# Altium PCB RHD2164 USBC.PcbDoc
Units mil, origin at the board's own origin, x right, y up, seen from the top; angles counter-clockwise.
Board outline 550.1 x 1005 mil, 6 copper layers (Top Layer, Second Layer, Third Layer, Fourth Layer, Fifth Layer, Bottom Layer), stack 32.112 mil thick; 11 components, 76 nets, 223 pads, 147 vias.
Unrouted connection lines stored in the file: 132.
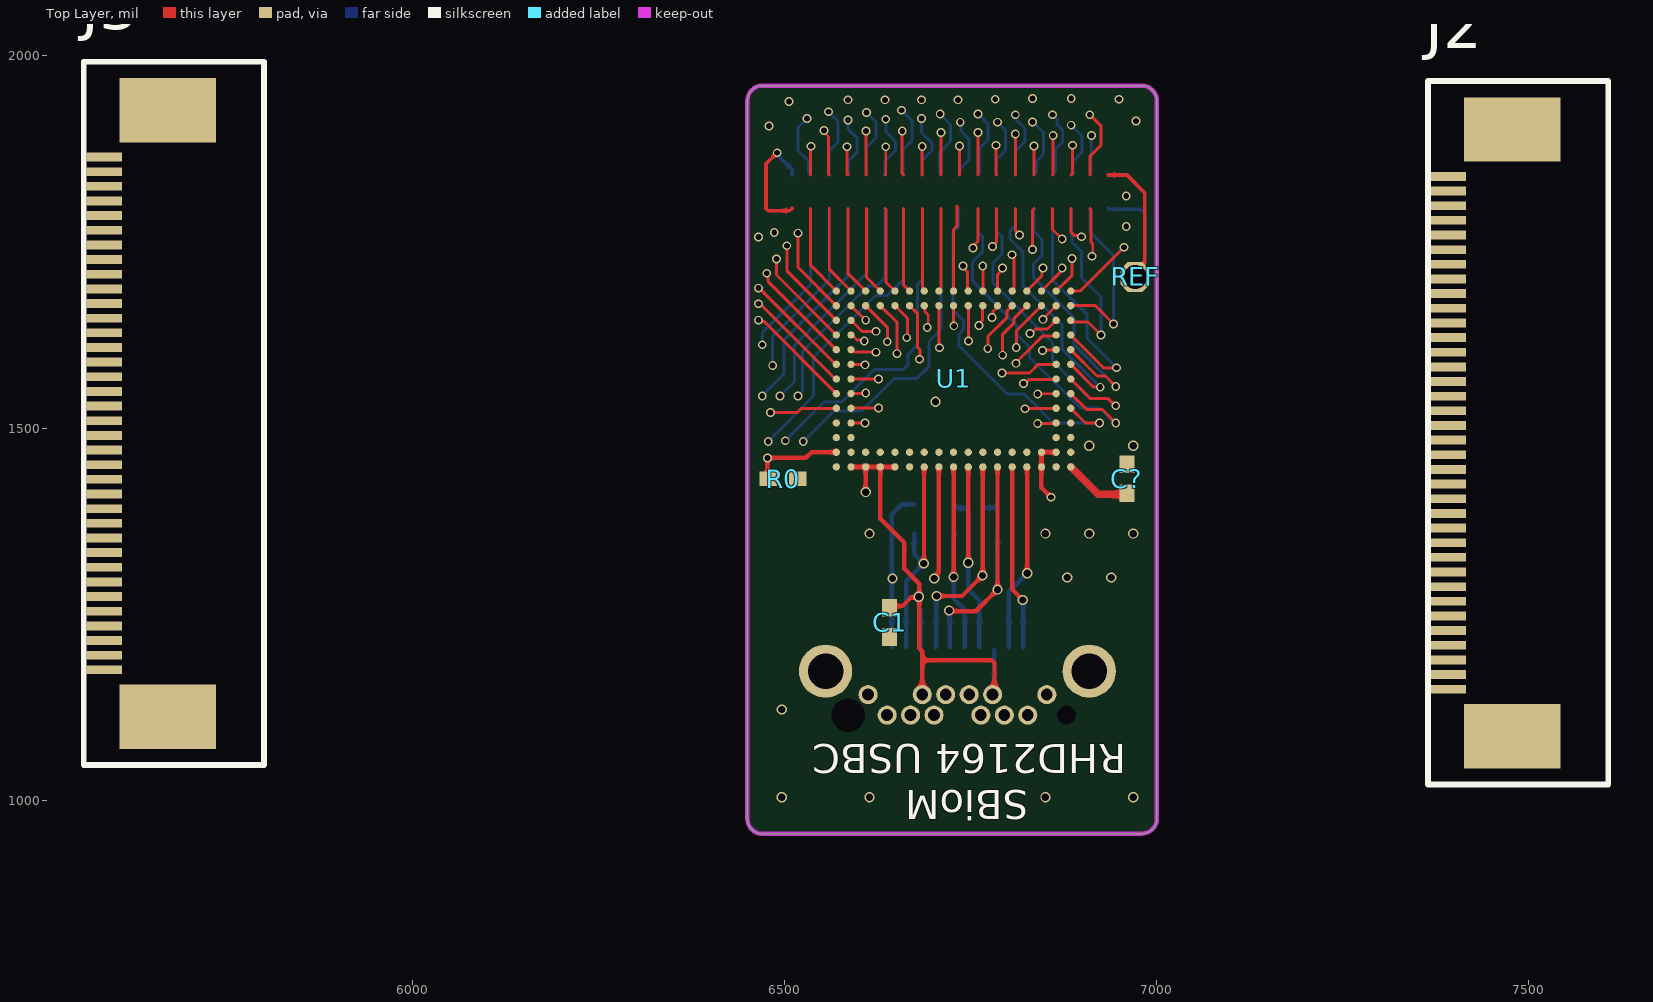
[diagram p0: Top Layer view]
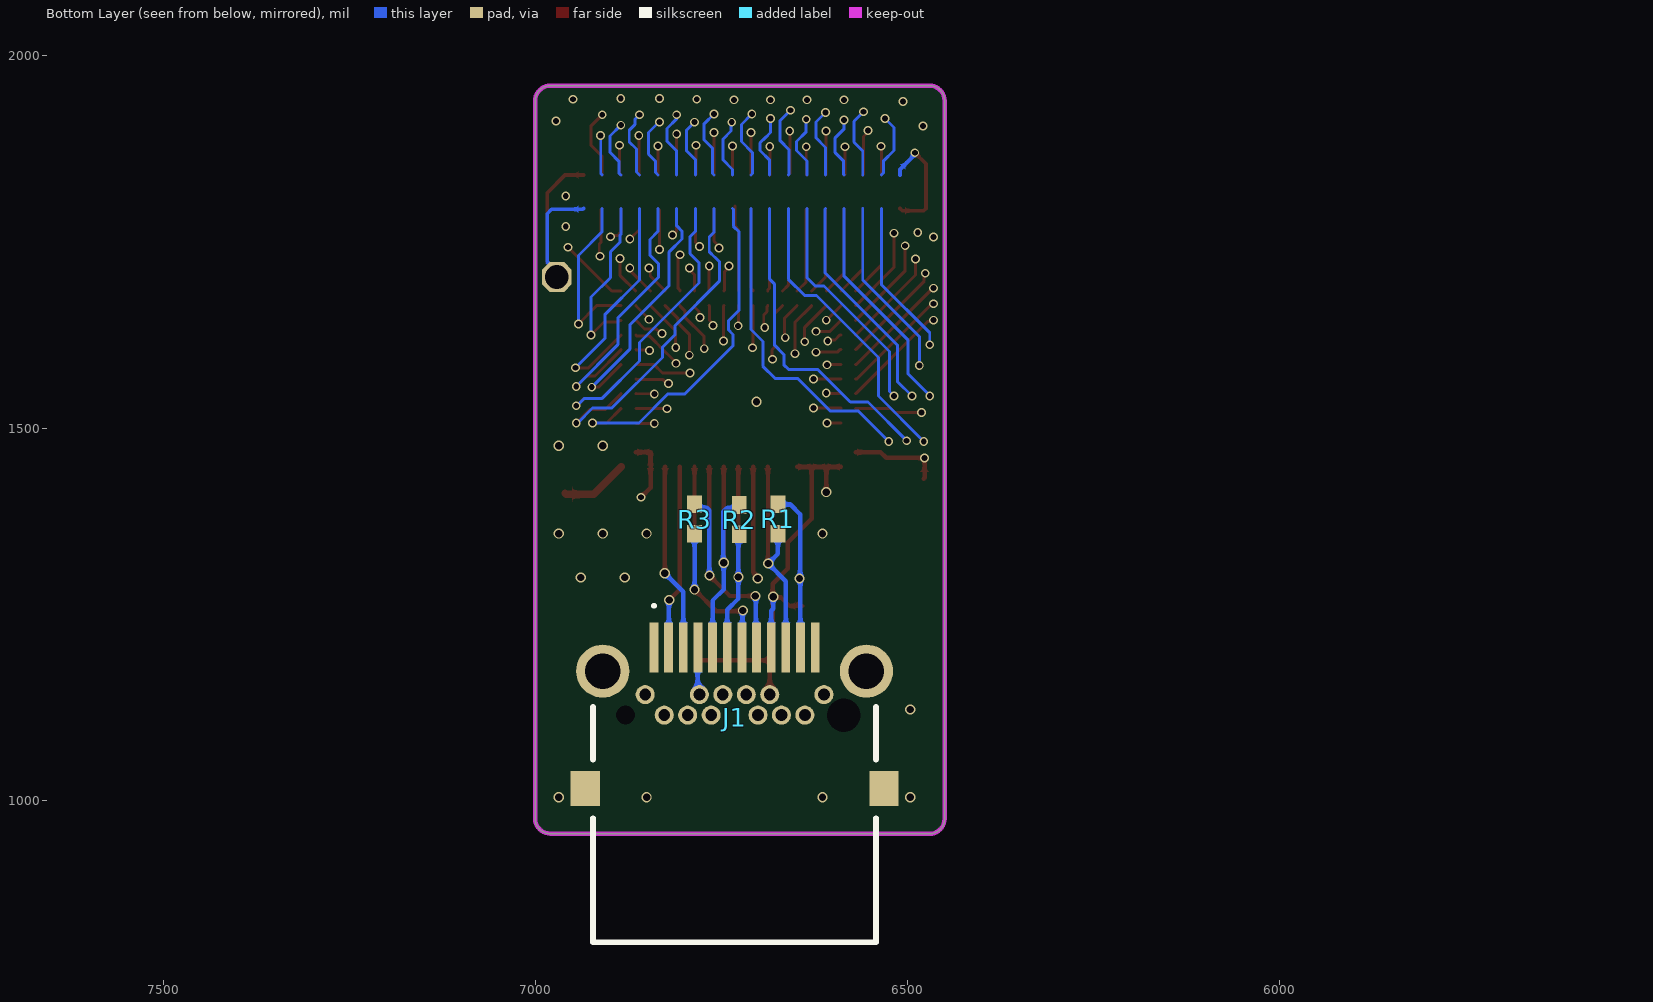
[diagram p1: Bottom Layer view, seen from below]
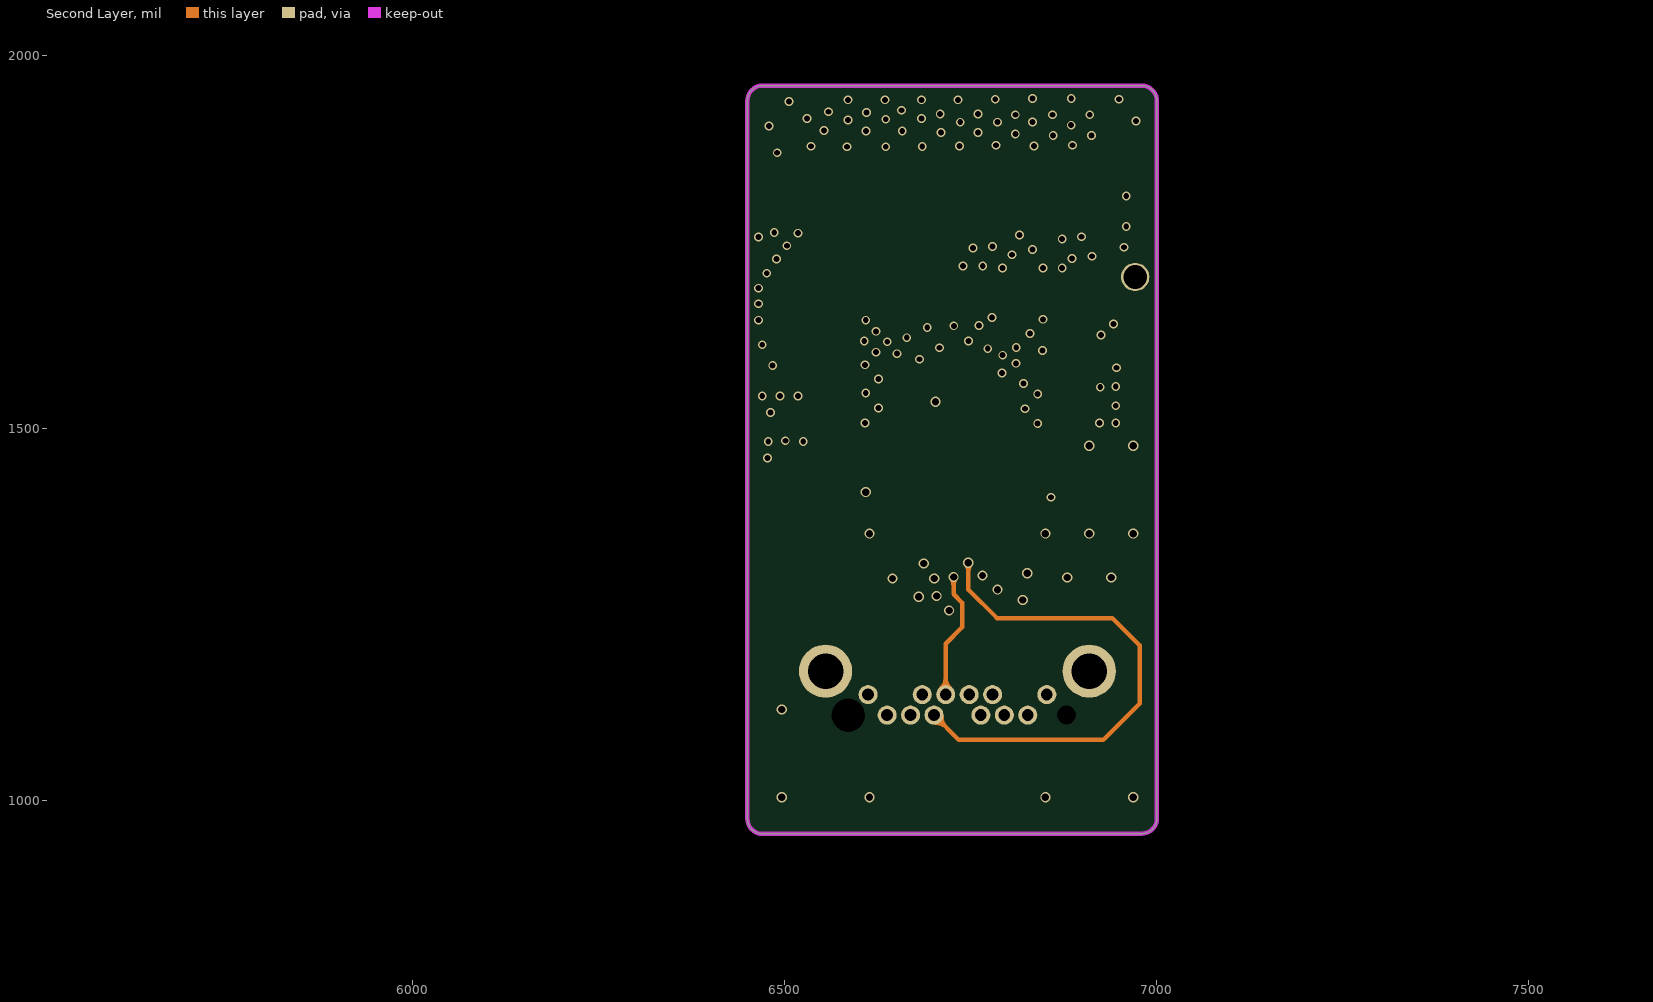
[diagram p2: Second Layer]
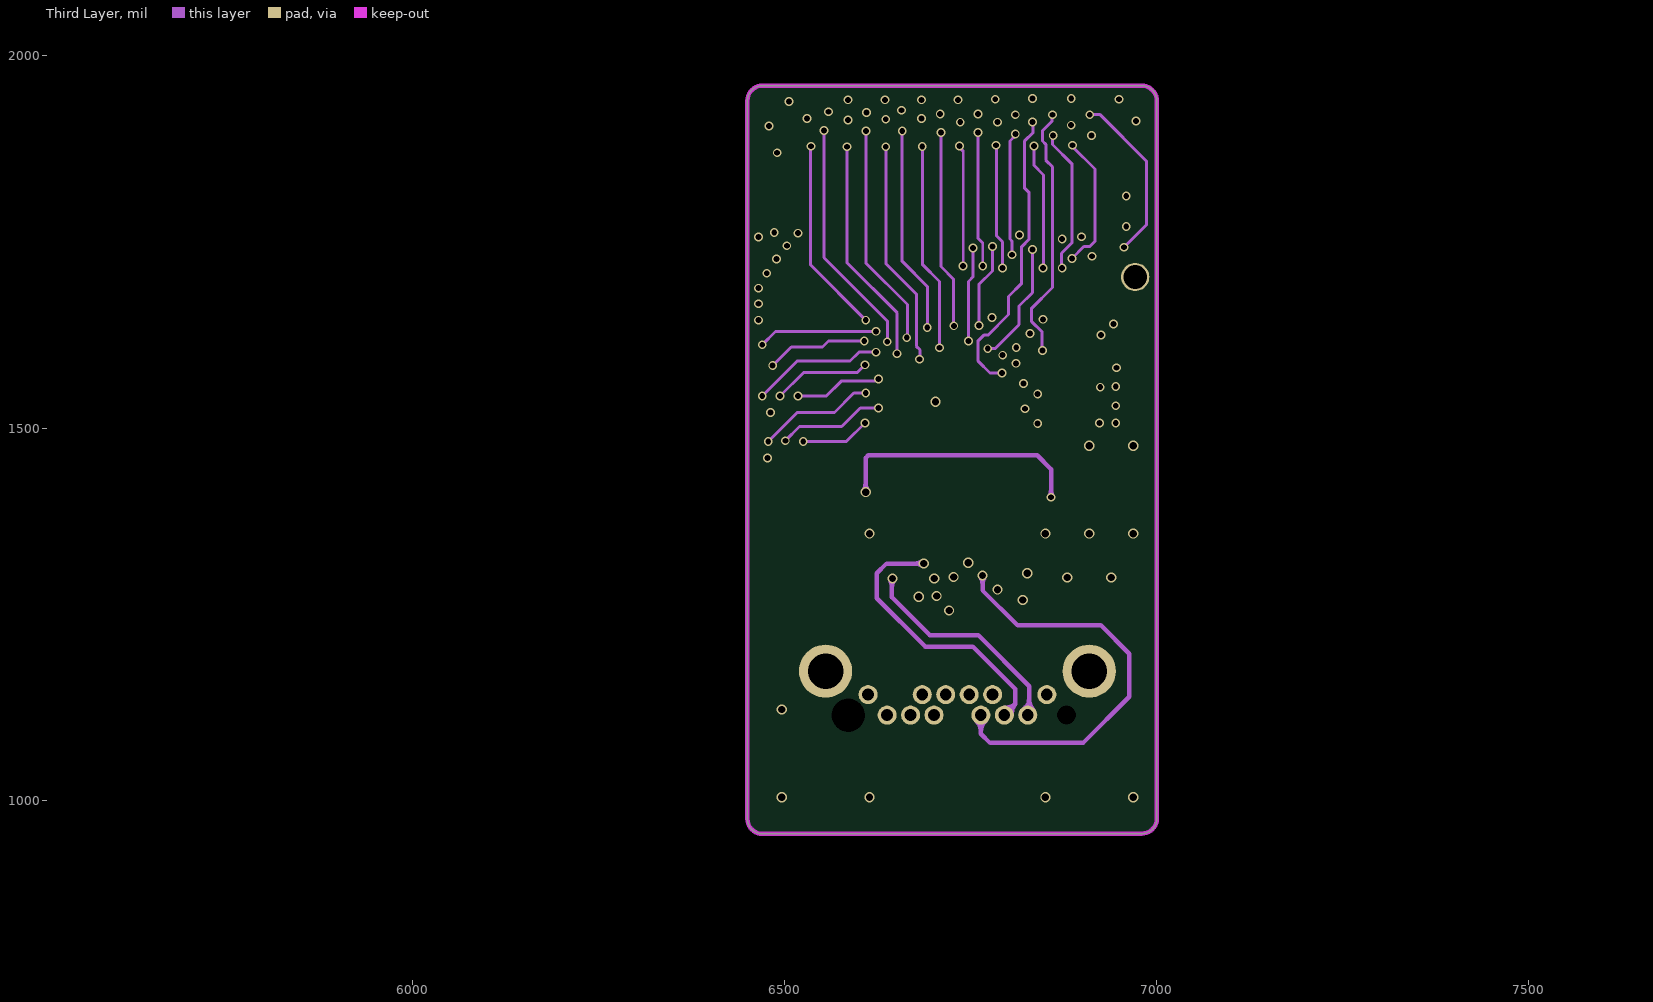
[diagram p3: Third Layer]
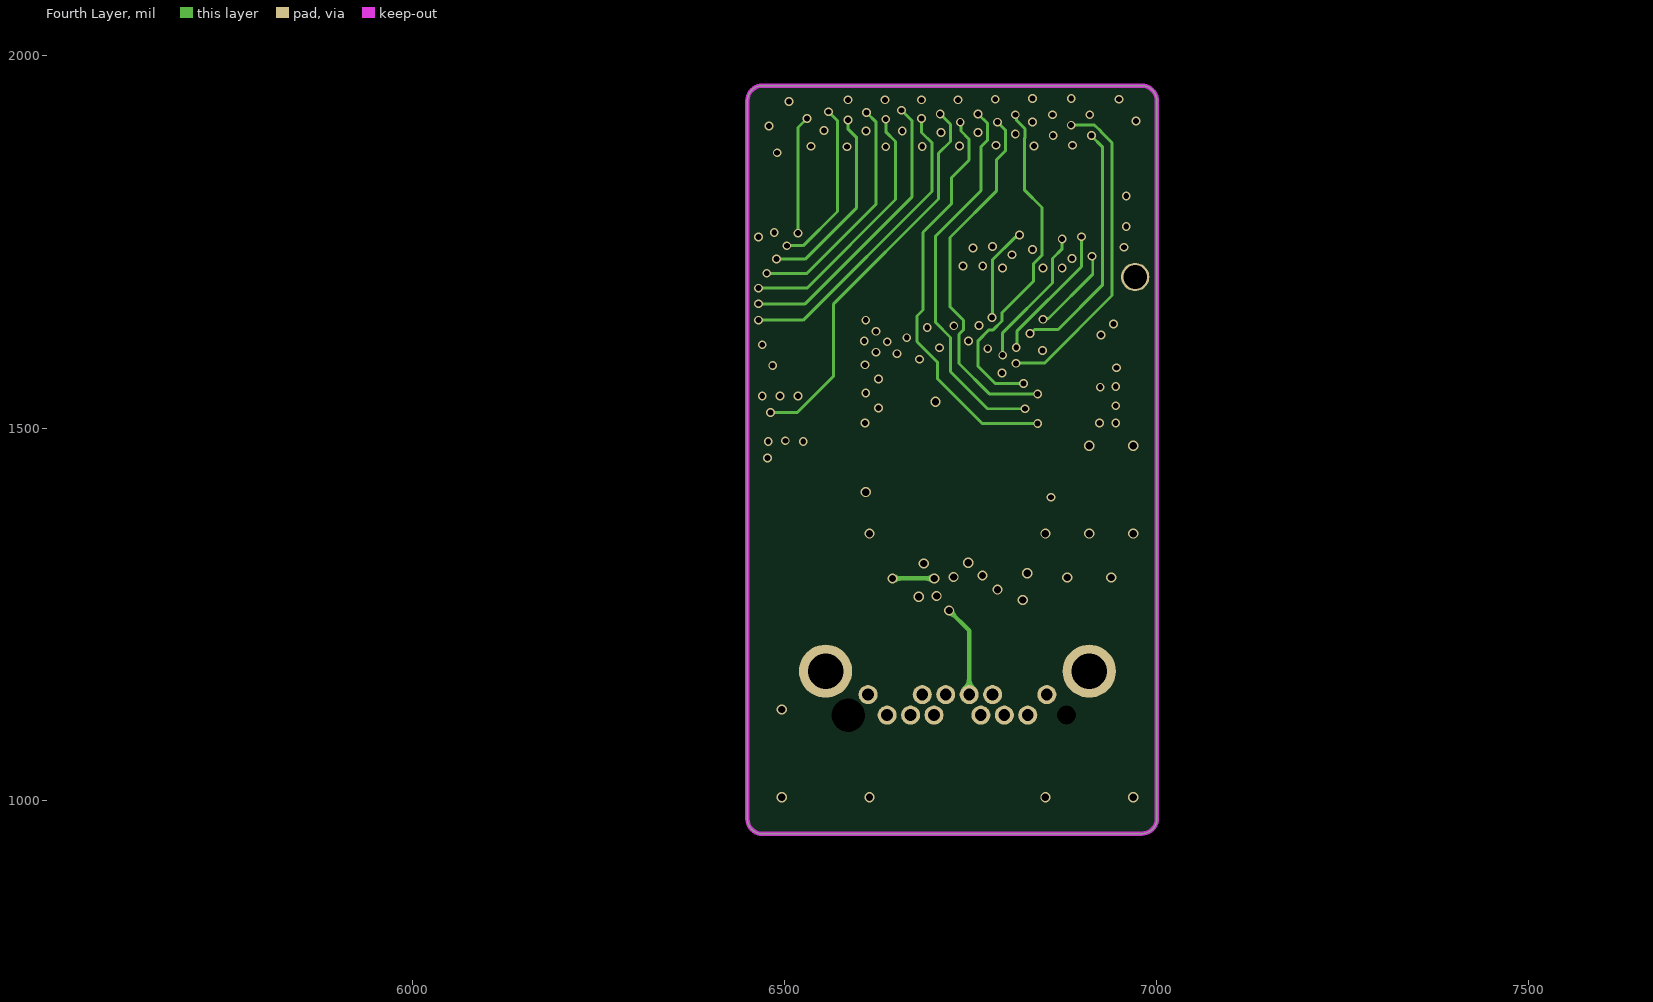
[diagram p4: Fourth Layer]
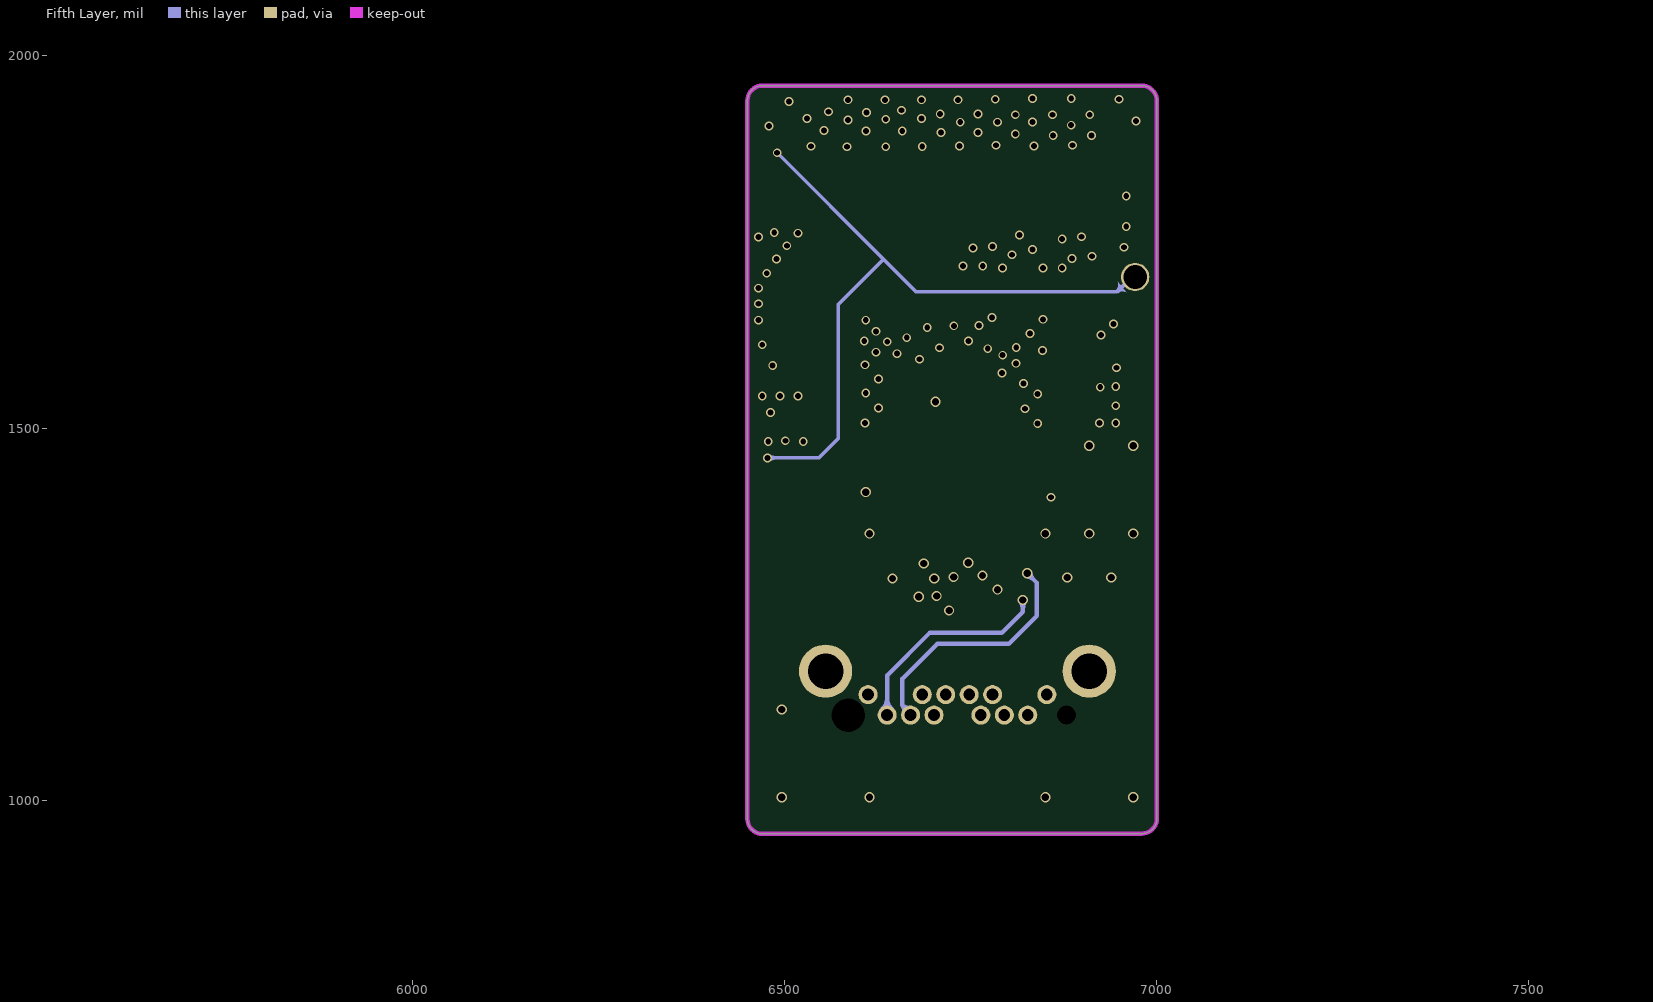
[diagram p5: Fifth Layer]

## Layer stack, top to bottom
Top Solder: solder mask 0.4, Solder Resist, Dk 3.5
Top Layer: signal copper 1.378
Dielectric 4: prepreg 2.8, PP-006, Dk 4.1
Second Layer: signal copper 1.378
Dielectric 2: prepreg 2.8, PP-006, Dk 4.1
Third Layer: signal copper 1.4
Dielectric 1: dielectric 12.6, FR-4, Dk 4.8
Fourth Layer: signal copper 1.4
Dielectric 3: prepreg 2.8, PP-006, Dk 4.1
Fifth Layer: signal copper 1.378
Dielectric 5: prepreg 2.8, PP-006, Dk 4.1
Bottom Layer: signal copper 1.378
Bottom Solder: solder mask 0.4, Solder Resist, Dk 3.5

## Board outline
6450,975 6450,1940 cw(c6470,1940) 6470,1960 6980,1960 cw(c6980,1940) 7000,1940 7000,975 7000.1,975.19 cw(c6980.1,975.19) 6980.1,955.19 6980,955 6470,955 cw(c6470,975)

## Design rules (kind name [scope] priority, off if disabled: settings)
Clearance [All] p1: gap=10 ignorepadtopadclearanceinfootprint=FALSE except(0: Arc-Hole Track-Hole SMDPad-Hole THPad-Hole Via-Hole Fill-Hole Poly-Hole Region-Hole Text-Hole; 5: Arc-Arc Arc-Track Arc-SMDPad Arc-THPad Arc-Via Arc-Fill Arc-Poly Arc-Region Arc-Text Track-Track Track-SMDPad Track-THPad Track-Via Track-Fill Track-Poly Track-Region Track-Text)
PolygonConnect [All] p1: connectstyle=Direct reliefconductorwidth=10 reliefentries=4 polygonreliefangle="90 Angle" airgapwidth=10
RoutingVias [All] p1: holewidth=7.87 width=11.81 viastyle="Through Hole" minholewidth=7.87 minwidth=11.81 maxholewidth=9.84 maxwidth=13.78
SolderMaskExpansion SolderMaskExpansion_1 [IsVia] p1: expansion=4 istentingtop=TRUE
SolderMaskExpansion [All] p2: expansion=4 istentingtop=FALSE
SupplyNets "Schematic Supply Nets_1" [InNet('GND')] p1: voltage=0.000
SupplyNets "Schematic Supply Nets" [InNet('VCC')] p2: voltage=0.000
Width [All] p1: maxlimit=10 minlimit=4 preferedwidth=5 minimp=50.000000 maximp=50.000000 favimp=50.000000
30 further rules are at their usual default settings.

## Components (designator, comment, footprint, x,y, rotation, side; value= is the part's Value field where it differs from the comment)
C1 "100n" 0402 6641,1239 r270 top
C? "10n" 0402 6960,1432 r90 top
J1 "UJ32-C-H-G-H2-SMT-TR" UJ32CHGH2SMTTR 6732.21,1006.16 r180 bottom
J2 "3-2492104-6" CON_ZIF_RA_36POS 7392,1493.68 r90 top
J3 "3-2492104-6" CON_ZIF_RA_36POS 5586,1519.73 r90 top
R0 "0" 0402 6498,1432 r180 top
R1 "Res Semi" 0402 6673.95,1377.81 r90 bottom value=100
R2 "Res Semi" 0402 6726,1377 r90 bottom value=100
R3 "Res Semi" 0402 6786,1377.81 r270 bottom value=100
REF "TESTPOINT_SMALL" TESTPOINT_SMALL 6971,1703 r90 top
U1 "Intan Technologies RHD2164 chip, BGA package (9x7mm 104-pin)" BGA104_9X7 6727,1566 r0 top

## Footprints (in the part's own frame and the unit in brackets; to place one, negate y for a bottom-side part, rotate by r counter-clockwise, add the part's x,y. Pads: shape width x height; smd on the part's side, far side on the other; paste and mask are expansions set on the pad)
0402 [mm] "Chip Capacitor, Body 1.0x0.5mm, IPC High Density"
  rect 0.6x0.5 smd: 1(-0.5,0) 2(0.5,0)
  body extent -0.55,-0.3 0.55,0.3, height 1.3
BGA104_9X7 [mm]
  rrect100% 0.25x0.25 smd: A1(-4,3) A2(-3.5,3) A3(-3,3) A4(-2.5,3) A5(-2,3) A6(-1.5,3) A7(-1,3) A8(-0.5,3) A9(0,3) A10(0.5,3) A11(1,3) A12(1.5,3) A13(2,3) A14(2.5,3) A15(3,3) A16(3.5,3) A17(4,3) B1(-4,2.5) B2(-3.5,2.5) B3(-3,2.5) B4(-2.5,2.5) B5(-2,2.5) B6(-1.5,2.5) B7(-1,2.5) B8(-0.5,2.5) B9(0,2.5) B10(0.5,2.5) B11(1,2.5) B12(1.5,2.5) B13(2,2.5) B14(2.5,2.5) B15(3,2.5) B16(3.5,2.5) B17(4,2.5) C1(-4,2) C2(-3.5,2) C16(3.5,2) C17(4,2) D1(-4,1.5) D2(-3.5,1.5) D16(3.5,1.5) D17(4,1.5) E1(-4,1) E2(-3.5,1) E16(3.5,1) E17(4,1) F1(-4,0.5) F2(-3.5,0.5) F16(3.5,0.5) F17(4,0.5) G1(-4,0) G2(-3.5,0) G16(3.5,0) G17(4,0) H1(-4,-0.5) H2(-3.5,-0.5) H16(3.5,-0.5) H17(4,-0.5) J1(-4,-1) J2(-3.5,-1) J16(3.5,-1) J17(4,-1) K1(-4,-1.5) K2(-3.5,-1.5) K16(3.5,-1.5) K17(4,-1.5) L1(-4,-2) L2(-3.5,-2) L16(3.5,-2) L17(4,-2) M1(-4,-2.5) M2(-3.5,-2.5) M3(-3,-2.5) M4(-2.5,-2.5) M5(-2,-2.5) M6(-1.5,-2.5) M7(-1,-2.5) M8(-0.5,-2.5) M9(0,-2.5) M10(0.5,-2.5) M11(1,-2.5) M12(1.5,-2.5) M13(2,-2.5) M14(2.5,-2.5) M15(3,-2.5) M16(3.5,-2.5) M17(4,-2.5) N1(-4,-3) N2(-3.5,-3) N3(-3,-3) N4(-2.5,-3) N5(-2,-3) N6(-1.5,-3) N7(-1,-3) N8(-0.5,-3) N9(0,-3) N10(0.5,-3) N11(1,-3) N12(1.5,-3) N13(2,-3) N14(2.5,-3) N15(3,-3) N16(3.5,-3) N17(4,-3)
CON_ZIF_RA_36POS [mm] "3-2492104-6 / 36 Position FPC Connector Contacts, Bottom 0.020\" (0.50mm) Surface Mount, Right Angle"
  rect 0.3x1.2 smd mask+0: 1(-8.75,0) 2(-8.25,0) 3(-7.75,0) 4(-7.25,0) 5(-6.75,0) 6(-6.25,0) 7(-5.75,0) 8(-5.25,0) 9(-4.75,0) 10(-4.25,0) 11(-3.75,0) 12(-3.25,0) 13(-2.75,0) 14(-2.25,0) 15(-1.75,0) 16(-1.25,0) 17(-0.75,0) 18(-0.25,0) 19(0.25,0) 20(0.75,0) 21(1.25,0) 22(1.75,0) 23(2.25,0) 24(2.75,0) 25(3.25,0) 26(3.75,0) 27(4.25,0) 28(4.75,0) 29(5.25,0) 30(5.75,0) 31(6.25,0) 32(6.75,0) 33(7.25,0) 34(7.75,0) 35(8.25,0) 36(8.75,0)
  rect 2.2x3.3 smd mask+0: M1(-10.35,-2.17) M2(10.35,-2.17)
  silkscreen extent -12,-5.45 12,0.7
TESTPOINT_SMALL [mil]
  oct 40x40 / inner round 38 / far side oct 40x40 hole 32: 1(0,0)
UJ32CHGH2SMTTR [mm]
  rect 0.3x1.7 smd: A1(-2.75,5.06) A2(-2.25,5.06) A3(-1.75,5.06) A4(-1.25,5.06) A5(-0.75,5.06) A6(-0.25,5.06) A7(0.25,5.06) A8(0.75,5.06) A9(1.25,5.06) A10(1.75,5.06) A11(2.25,5.06) A12(2.75,5.06)
  round 0.65 hole 0.4: B1(3.05,3.45) B2(2.4,2.75) B3(1.6,2.75) B4(1.2,3.45) B5(0.8,2.75) B6(0.4,3.45) B7(-0.4,3.45) B8(-0.8,2.75) B9(-1.2,3.45) B10(-1.6,2.75) B11(-2.4,2.75) B12(-3.05,3.45)
  round 1.815 hole 1.21: MH1(-4.5,4.25) MH2(4.5,4.25)
  round 0.325 hole 0.65 unplated: MH3(-3.725,2.75)
  round 0.57 hole 1.14 unplated: MH4(3.725,2.75)
  rect 1x1.2 smd: MP1(-5.1,0.25) MP2(5.1,0.25)
  silkscreen extent -4.82,-5 4.82,6.53

## Part data
C1 C?: library part C_0402, "Capacitor", DeviceName=_0402, DeviceSetName=C, GateName_1=C, LibraryName=RHD2000_eval_board, SymbolName_1=C
J1: "USB Connectors Type C USB 3.2 Gen 2x2 20 Gbps 20 Vac 5 A Horizontal Gold Flash Surface Mount", Manufacturer_Name="Same Sky", Mouser Part Number=179-UJ32CHGH2SMTTR, Datasheet Link=https://www.cuidevices.com/product/resource/uj32-c-h-g-h2-smt-tr.pdf, Geometry.Height=3.62mm, Manufacturer_Part_Number=UJ32-C-H-G-H2-SMT-TR, Mouser Price/Stock=https://www.mouser.co.uk/ProductDetail/CUI-Devices/UJ32-C-H-G-H2-SMT-TR?qs=vvQtp7zwQdN9hqweK3Xukg%3D%3D
J2 J3: library part CON_ZIF_RA_36POS, "36 Position FPC Connector Contacts, Bottom 0.020\" (0.50mm) Surface Mount, Right Angle", GRAMS Lib Spec=2.7
R0: library part R_0402, "Resistor", DeviceName=_0402, DeviceSetName=R, GateName_1=R, LibraryName=RHD2000_eval_board, SymbolName_1=R
R1 R2 R3: "Semiconductor Resistor", LatestRevisionDate=17-Jul-2002, LatestRevisionNote="Re-released for DXP Platform.", PackageDescription="Axial Device, Thru-Hole; 2 Leads; 0.5 in Pin Spacing", PackageReference=AXIAL-0.5, Published=8-Jun-2000, Publisher="Altium Limited"
REF: "PCB Test Point", DeviceName=_SMALL, DeviceSetName=TESTPOINT, GateName_1=TP$1, LibraryName=RHD2000_eval_board, SymbolName_1=TESTPOINT
U1: library part RHD2164_BGA_BGA, Package=BGA104_9X7, DeviceName=_BGA, DeviceSetName=RHD2164_BGA, GateName_1=A, LibraryName=RHD2000, SymbolName_1=RHD2164_BGA

## Via types
v1: diameter 11.81, hole 7.87, Top Layer to Bottom Layer, tented both sides, 120 vias
v2: diameter 13.78, hole 9.84, Top Layer to Bottom Layer, tented both sides, 27 vias

## Nets (pads, with @x,y where several pads share a name; then routed paths per layer and width w, separated by ;. In a path a pad name is that pad's centre, name@x,y a point inside that pad or via, vN(x,y) a via of type N, cw(c..) or ccw(c..) an arc to the next point about the centre after c; other vN are vias at no path point)
GND: C1.2 C?.2 J1.A1 J1.A12 J1.B1 J1.B12 J1.MH1 J1.MH2 J1.MP1 J1.MP2 J2.18 J2.19 J3.18 J3.19 R0.1 U1.K1 U1.K17 U1.L1 U1.L2 U1.L16 U1.M2 U1.M3 U1.M4 U1.M5 U1.M6 U1.M7 U1.M8 U1.M9 U1.M10 U1.M11 U1.M12 U1.M13 U1.M14 U1.M17 U1.N1 U1.N6
  other v1: 6465.08,1756.76 6486.08,1762.76 6959,1771 6959.08,1811.76 6479.08,1905.76 6972.08,1912.76 6506.08,1938.76 6585,1941 6635,1941 6684,1941 6733,1941 6783.08,1941.76 6949.08,1941.76 6833.08,1942.76 6885.08,1942.76
  other v2: 6496.06,1003.94 6614.17,1003.94 6850.39,1003.94 6968.5,1003.94 6496.06,1122.05 6879.92,1299.21 6938.97,1299.21 6614.17,1358.27 6850.39,1358.27 6909.45,1358.27 6968.5,1358.27 6909.45,1476.38 6968.5,1476.38 6702.75,1535.43
INPUT_01: J3.1 U1.K2 | length 541.8
  Top Layer w4: U1.K2@6589.23,1506.97 v1(6608,1507)
  Third Layer w4: v1(6525,1482) 6583,1482 v1(6608,1507)
  Bottom Layer w4: v1(6525,1482) 6566,1523 6603.75,1523 6647.58,1566.83 6677.83,1566.83 6694.19,1583.19 6694.19,1603.47 6694,1603.65 6694,1616.41 6710,1632.41 6710,1795
INPUT_02: J3.2 U1.J1 | length 713.8
  Top Layer w4: v1(6481,1521) 6517.14,1521 6522.77,1526.63 U1.J1
  Fourth Layer w4: v1(6481,1521) 6481.2,1521.2 6517.34,1521.2 6523.14,1527 6565.97,1569.84 6565.97,1666.97 6706.91,1807.91 6706.91,1869.16 6722.91,1885.16 6722.91,1908.09 v1(6709,1922)
  Bottom Layer w4: v1(6709,1922) 6723,1908 6723,1885 6708,1870 6708,1842 6710,1840
INPUT_03: J3.3 U1.J2 | length 605.3
  Top Layer w4: U1.J2 6589.39,1526.82 6625.81,1526.82 v1(6626,1527)
  Third Layer w4: v1(6501,1483) 6520,1502 6576.73,1502 6601.73,1527 v1(6626,1527)
  Bottom Layer w4: v1(6501,1483) 6553,1535 6576.75,1535 6620.65,1578.91 6659.91,1578.91 6666,1585 6666,1599 6678.84,1611.84 6678.84,1693.84 6685,1700 6685,1795
INPUT_04: J3.4 U1.H1 | length 641.1
  Top Layer w4: v1(6465,1645) 6466.49,1643.51 6472.32,1643.51 U1.H1
  Fourth Layer w4: v1(6465,1645) 6525,1645 6697.91,1817.91 6697.91,1883.35 6684,1897.25 v1(6684,1916)
  Bottom Layer w4: v1(6684,1916) 6684,1897 6690.09,1890.91 6690.35,1890.91 6698,1883.25 6698,1873 6685,1860 6685,1840
INPUT_05: J3.5 U1.H2 | length 575.6
  Top Layer w4: U1.H2 6589.55,1546.65 6608.65,1546.65 v1(6609,1547)
  Third Layer w4: v1@6478.14,1482.14 6517,1521 6567,1521 6593,1547 v1(6609,1547)
  Bottom Layer w4: v1(6478,1482) 6539,1543 6539,1595 6621.98,1677.98 6637.98,1677.98 6660,1700 6660,1795
INPUT_06: J3.6 U1.G1 | length 632.3
  Top Layer w4: v1(6465,1667) 6466.94,1667 6567.94,1566 U1.G1
  Fourth Layer w4: v1(6465,1667) 6527.73,1667 6670.91,1810.18 6670.91,1913.09 v1(6657,1927)
  Bottom Layer w4: v1(6657,1927) 6670.91,1913.09 6670.91,1885.91 6659,1874 6659,1841 6660,1840
INPUT_07: J3.7 U1.G2 | length 461.8
  Top Layer w4: U1.G2 v1(6626,1566)
  Third Layer w4: v1(6518,1543) 6556,1543 6576,1563 6620.89,1563 6623.89,1566 v1(6626,1566)
  Bottom Layer w4: v1(6518,1543) 6518,1543.25 6524,1549.25 6524,1603 6611.94,1690.94 6623.94,1690.94 6635,1702 6635,1795
INPUT_08: J3.8 U1.F1 | length 579.8
  Top Layer w4: v1(6465,1688) 6466.11,1688 6568.42,1585.69 U1.F1
  Fourth Layer w4: v1(6465,1688) 6530,1688 6649,1807 6649,1885 6636,1898 v1(6636,1915)
  Bottom Layer w4: 6635,1840 6635,1858.84 6649,1872.84 6649,1885 6636,1898 v1(6636,1915)
INPUT_09: J3.10 U1.F2 | length 451.4
  Top Layer w4: U1.F2 6589.55,1585.35 6607.65,1585.35 v1(6608,1585)
  Third Layer w4: v1(6494,1543) 6526,1575 6598,1575 v1(6608,1585)
  Bottom Layer w4: v1(6494,1543) 6513,1562 6513,1611 6611,1709 6611,1794 6610,1795
INPUT_10: J3.11 U1.E1 | length 550
  Top Layer w4: v1(6476,1708) 6477.49,1706.51 6477.49,1697.4 U1.E1
  Fourth Layer w4: v1(6476,1708) 6530,1708 6623,1801 6623,1911 v1(6610,1924)
  Bottom Layer w4: 6610,1840 6610,1877 6622.91,1889.91 6622.91,1911.09 v1(6610,1924)
INPUT_11: J3.12 U1.E2 | length 512.3
  Top Layer w4: U1.E2 6590.78,1605.37 6594.15,1602 v1(6623,1602)
  Third Layer w4: v1(6470,1543) 6517,1590 6588,1590 6600,1602 v1(6623,1602)
  Bottom Layer w4: v1(6470,1543) 6470,1543.84 6499,1572.84 6499,1618 6585,1704 6585,1795
INPUT_12: J3.13 U1.D1 | length 478.5
  Top Layer w4: v1(6489,1727) 6489,1705.58 U1.D1
  Fourth Layer w4: v1(6489,1727) 6527.73,1727 6596.91,1796.18 6596.91,1890.09 6585,1902 v1(6585,1914)
  Bottom Layer w4: 6585,1840 6585.66,1840.66 6585.66,1858.66 6597,1870 6597,1890 6585,1902 v1(6585,1914)
INPUT_13: J3.14 U1.D2 | length 400.3
  Top Layer w4: U1.D2 6590.78,1625.06 6597.35,1618.49 6605.51,1618.49 v1(6607,1617)
  Third Layer w4: v1(6484,1584) 6509,1609 6551,1609 6559,1617 v1(6607,1617)
  Bottom Layer w4: v1(6484,1584) 6484,1623 6560,1699 6560,1795
INPUT_14: J3.15 U1.C1 | length 449.3
  Top Layer w4: v1(6503,1745) 6503,1711.26 U1.C1
  Fourth Layer w4: v1(6503,1745) 6503.11,1745.11 6516.91,1745.11 6517.02,1745 6525,1745 6571.09,1791.09 6571.09,1912.91 v1(6559,1925)
  Bottom Layer w4: v1(6559,1925) 6571.91,1912.09 6571.91,1884.16 6560,1872.25 6560,1840
INPUT_15: J3.16 U1.C2 | length 410.3
  Top Layer w4: U1.C2 6603.94,1630 v1(6623,1630)
  Third Layer w4: v1(6470,1612) 6487.87,1629.87 6590.87,1629.87 ; 6590.91,1629.91 6622.91,1629.91 v1(6623,1630)
  Bottom Layer w4: v1(6470,1612) 6470,1628 6535,1693 6535,1795
INPUT_16: J3.17 U1.B1 | length 365.9
  Top Layer w4: v1(6518,1761.91) 6518,1715.95 U1.B1
  Fourth Layer w4: v1(6518,1761.91) 6518,1904 v1(6530,1916)
  Bottom Layer w4: v1(6530,1916) 6518,1904 6518,1873 6532.34,1858.66 6532.34,1842.66 6535,1840
INPUT_17: J2.20 U1.A1 | length 125.2
  Top Layer w4: 6535,1795 6535,1718.63 U1.A1
INPUT_18: J2.21 U1.B2 | length 331.3
  Top Layer w4: 6535,1840 6535,1878 v1(6535.63,1878.63) ; U1.B2 6589.39,1664.43 6608.81,1645 v1(6609,1645)
  Third Layer w4: v1(6535.63,1878.63) 6535,1878 6535,1719 v1(6609,1645)
INPUT_19: J2.22 U1.A2 | length 123
  Top Layer w4: 6560,1795 6560,1713.31 U1.A2
INPUT_20: J2.23 U1.B3 | length 442.6
  Top Layer w4: v1(6553,1900) 6553,1897.89 6559,1891.89 6559,1841 6560,1840 ; U1.B3 6638,1635.32 v1(6638,1616)
  Third Layer w4: v1(6553,1900) 6553,1729 6638,1644 v1(6638,1616)
INPUT_21: J2.24 U1.A3 | length 120.8
  Top Layer w4: 6585,1795 6585,1708 U1.A3
INPUT_22: J2.25 U1.B4 | length 418.2
  Top Layer w4: v1(6584,1878) 6584,1841 6585,1840 ; U1.B4 6651.19,1641.81 6651.19,1600.19 v1(6651,1600)
  Third Layer w4: v1(6584,1878) 6584,1722 6651.19,1654.81 6651.19,1600.19 v1(6651,1600)
INPUT_23: J2.26 U1.A4 | length 118.6
  Top Layer w4: 6610,1795 6610,1702.68 U1.A4
INPUT_24: J2.27 U1.B5 | length 410.6
  Top Layer w4: v1(6609.19,1899) 6609.19,1840.81 6610,1840 ; U1.B5 6665,1647.69 6665,1622.38 v1(6664.09,1621.47)
  Third Layer w4: v1(6609.19,1899) 6609.19,1721.81 6665,1666 6665,1622.38 v1(6664.09,1621.47)
INPUT_25: J2.29 U1.A5 | length 116.4
  Top Layer w4: 6635,1795 6636,1794 6636,1696.37 U1.A5
INPUT_26: J2.30 U1.B6 | length 421.2
  Top Layer w4: 6635,1840 6635.91,1840.91 v1(6635.91,1878) ; U1.B6 6678.84,1653.53 6678.84,1608.16 6681.91,1605.09 6681.91,1593.09 v1(6681.28,1592.47)
  Third Layer w4: v1(6635.91,1878) 6636,1877.91 6636,1721 6677,1680 6677,1610 6681.91,1605.09 6681.91,1593.09 v1(6681.28,1592.47)
INPUT_27: J2.31 U1.A6 | length 114.2
  Top Layer w4: 6660,1795 6660,1692.05 U1.A6
INPUT_28: J2.32 U1.B7 | length 370
  Top Layer w4: v1(6658,1899) 6658,1842 6660,1840 ; U1.B7 6688.75,1663.31 6688.75,1656.35 6693,1652.1 6693,1636.25 v1(6691.75,1635)
  Third Layer w4: v1(6658,1899) 6658,1724 6691.75,1690.25 v1(6691.75,1635)
INPUT_29: J2.33 U1.A7 | length 112
  Top Layer w4: 6685,1795 6685,1688.32 6687.63,1685.69 U1.A7
INPUT_30: J2.34 U1.B8 | length 374.6
  Top Layer w4: v1(6684.87,1878.13) 6684.87,1840.13 6685,1840 ; U1.B8 6707.65,1664.09 6707.65,1608.35 v1(6708,1608)
  Third Layer w4: v1(6684.87,1878.13) 6685,1878 6685,1720 6708,1697 v1(6708,1608)
INPUT_31: J2.35 U1.A8 | length 112
  Top Layer w4: U1.A8 6707.31,1685.69 6710,1688.38 6710,1795
INPUT_32: J2.36 U1.B9 | length 351
  Top Layer w4: 6710,1840 v1(6710,1897) ; U1.B9 6727.19,1664.24 6727.19,1637.56 v1(6727.37,1637.37)
  Third Layer w4: v1(6710,1897) 6710,1717 6727,1700 6727,1637.75 v1(6727.37,1637.37)
INPUT_33: J2.1 U1.A9 | length 116.2
  Top Layer w4: U1.A9 6727,1704.93 6726.85,1705.07 6726.85,1766.85 6731.34,1771.34 6731.34,1798.34
INPUT_34: J2.2 U1.A10 | length 238.9
  Top Layer w4: 6735,1840 v1(6735,1879) ; v1(6739.76,1717.84) 6739.76,1716.13 6745.85,1710.04 6745.85,1684.95 U1.A10
  Third Layer w4: v1(6735,1879) 6735,1876.89 6740.02,1871.87 6740.02,1718.1 v1(6739.76,1717.84)
INPUT_35: J2.3 U1.B10 | length 231
  Top Layer w4: U1.B10 6746.85,1664.28 6746.85,1617.41 v1(6747.13,1617.13) ; v1(6753,1742) 6753,1744.11 6760,1751.11 6760,1795
  Third Layer w4: v1(6747.13,1617.13) 6747,1617.25 6747,1697 6753.27,1703.27 6753.27,1741.73 v1(6753,1742)
INPUT_36: J2.4 U1.A11 | length 272.6
  Top Layer w4: 6760,1840 v1(6760,1897) ; v1(6766.18,1717.65) 6766.3,1717.53 6766.3,1684.18 U1.A11
  Third Layer w4: v1(6760,1897) 6760,1755 6766.23,1748.77 6766.23,1717.7 v1(6766.18,1717.65)
INPUT_37: J2.5 U1.B11 | length 195.6
  Top Layer w4: v1(6761,1638) 6761,1640.11 6765.6,1644.72 6765.6,1663.66 U1.B11 ; v1(6779.14,1743.98) 6779.14,1744.11 6785,1749.98 6785,1795
  Third Layer w4: v1(6761,1638) 6761,1693 6779.2,1711.2 6779.2,1743.92 v1(6779.14,1743.98)
INPUT_38: J2.6 U1.A12 | length 242.6
  Top Layer w4: v1(6784.19,1880) 6784.19,1840.81 6785,1840 ; U1.A12 6786.06,1706.11 6792.83,1712.89 v1(6792.83,1715)
  Third Layer w4: v1(6784.19,1880) 6785,1879.19 6785,1758 6792.67,1750.33 6792.67,1715.16 v1(6792.83,1715)
INPUT_39: J2.7 U1.B12 | length 185.2
  Top Layer w4: v1(6778.51,1648.49) 6780.01,1649.98 6780.01,1656.79 6786.06,1662.85 U1.B12 ; 6810,1795 6810,1765.11 6815.75,1759.36 v1(6815.75,1759.25)
  Fourth Layer w4: v1(6778.51,1648.49) 6779.08,1649.06 6779.08,1725.67 6809.79,1756.38 6810.76,1756.38 6813.64,1759.25 v1(6815.75,1759.25)
INPUT_40: J2.8 U1.A13 | length 272.3
  Top Layer w4: v1(6805.58,1732.92) 6805.58,1730.8 6808.44,1727.94 6808.44,1688.39 6805.74,1685.69 U1.A13 ; 6810,1840 v1(6810,1895)
  Third Layer w4: v1(6805.58,1732.92) 6805.25,1733.24 6805.25,1751.5 6802.84,1753.91 6802.84,1885.73 6810,1892.89 v1(6810,1895)
INPUT_41: J2.10 U1.B13 | length 291
  Top Layer w4: v1(6773,1606.7) 6773,1623 6799,1649 6799,1657.69 U1.B13 ; v1(6833,1740) 6833,1793 6835,1795
  Third Layer w4: v1(6773,1606.7) 6782.7,1606.7 6815,1639 6815,1664 6833,1682 v1(6833,1740)
INPUT_42: J2.11 U1.A14 | length 248.6
  Top Layer w4: U1.A14 6845.51,1704.19 6845.51,1713.51 v1(6847,1715) ; 6835,1840 v1(6835,1879)
  Third Layer w4: v1(6835,1879) 6835,1853 6848,1840 6848,1716 v1(6847,1715)
INPUT_43: J2.12 U1.B14 | length 315.3
  Top Layer w4: v1(6793,1598) 6793,1625.99 6808,1640.99 6808,1647 U1.B14 ; 6860,1795 6860,1766.91 v1(6872.91,1754)
  Fourth Layer w4: v1(6793,1598) 6793,1628 6859.91,1694.91 6859.91,1727.91 6872.91,1740.91 v1(6872.91,1754)
INPUT_44: J2.13 U1.A15 | length 290.9
  Top Layer w4: U1.A15 6870.51,1709.51 6870.51,1710.49 6872.91,1712.89 v1(6872.91,1715) ; 6860,1840 6860.81,1840.81 v1(6860.81,1893)
  Third Layer w4: v1(6860.81,1893) 6860,1892.19 6860,1881 6885.81,1855.19 6885.81,1748.65 6872,1734.84 6872,1715.91 v1(6872.91,1715)
INPUT_45: J2.14 U1.B15 | length 303.6
  Top Layer w4: v1(6811.25,1608.25) 6811.25,1630.55 6817,1636.3 U1.B15 ; 6885,1795 6885,1762.95 6889.45,1758.49 6897.22,1758.49 v1(6898.72,1757)
  Fourth Layer w4: v1(6811.25,1608.25) 6812,1609 6812,1630 6898.91,1716.91 6898.91,1737.93 6898.72,1738.12 v1(6898.72,1757)
INPUT_46: J2.15 U1.A16 | length 275.3
  Top Layer w4: U1.A16@6865.12,1684.11 6885.81,1704.81 6885.81,1727.81 v1(6886,1728) ; 6885,1840 6886.62,1841.62 v1(6886.62,1880)
  Third Layer w4: v1(6886,1728) 6902,1744 6910,1744 6917,1751 6917,1848 6886.62,1878.38 v1(6886.62,1880)
INPUT_47: J2.16 U1.B16 | length 208.3
  Top Layer w4: v1(6847.13,1646.13) 6847.13,1646.44 6864.8,1664.12 U1.B16 ; 6910,1795 6911.62,1793.38 6911.62,1749.61 6914,1747.23 6914,1731.88 v1(6913.06,1730.94)
  Fourth Layer w4: v1(6847.13,1646.13) 6848.41,1647.41 6854.68,1647.41 6914,1706.72 6914,1730 v1(6913.06,1730.94)
INPUT_48: J2.17 U1.A17 | length 419.7
  Top Layer w4: U1.A17 6897.11,1684.11 v1(6956,1743) ; 6910,1840 6910,1865 6925.33,1880.33 6925.33,1905.67 v1(6910,1921)
  Third Layer w4: v1(6910,1921) 6924,1921 6986,1859 6986,1773 v1(6956,1743)
INPUT_49: J3.20 U1.B17 | length 235.9
  Top Layer w4: U1.B17 6917.57,1664.43 v1(6942,1640)
  Bottom Layer w4: 6910,1795 6910,1763.97 6942,1731.97 v1(6942,1640)
INPUT_50: J3.21 U1.C16 | length 427.5
  Top Layer w4: v1(6829.83,1626.92) 6831.04,1626.92 6837.33,1633.22 6853.28,1633.22 U1.C16
  Fourth Layer w4: v1(6829.83,1626.92) 6830.37,1626.92 6836.08,1632.63 6867.63,1632.63 6926.91,1691.91 6926.91,1878.09 6912.42,1892.58 v1(6912.42,1893.02)
  Bottom Layer w4: 6910,1840 6912,1842 6912,1892.6 v1(6912.42,1893.02)
INPUT_51: J3.22 U1.C17 | length 235.3
  Top Layer w4: U1.C17 6886.06,1644.74 6888.39,1642.41 6907.59,1642.41 v1(6925,1625)
  Bottom Layer w4: 6885,1795 6885,1760.16 6885.81,1759.35 6885.81,1749.94 6898.91,1736.84 6898.91,1702.09 6925,1676 v1(6925,1625)
INPUT_52: J3.23 U1.D16 | length 586.4
  Top Layer w4: v1(6811,1587) 6811,1588 6833.09,1610.09 6833.09,1610.35 6840.65,1617.91 6840.91,1617.91 6846.94,1623.94 6863.68,1623.94 U1.D16
  Fourth Layer w4: v1(6811,1587) 6811.58,1587.58 6849.58,1587.58 6940,1678 6940,1883.25 6925.33,1897.92 6925.33,1898.36 6917.77,1905.92 6917.33,1905.92 6916.25,1907 v1(6885,1907)
  Bottom Layer w4: 6885,1840 6887.66,1842.66 6887.66,1858.66 6899.53,1870.53 6899.53,1892.47 v1(6885,1907)
INPUT_53: J3.24 U1.D17 | length 329.4
  Top Layer w4: U1.D17 6928.54,1581 v1(6946,1581)
  Bottom Layer w4: 6860,1795 6860,1699 6906,1653 6906,1621 v1(6946,1581)
INPUT_54: J3.25 U1.E16 | length 456.3
  Top Layer w4: v1(6846.63,1604.37) 6847.12,1604.87 6864.3,1604.87 U1.E16
  Third Layer w4: v1(6846.63,1604.37) 6846,1605 6846,1629 6832,1643 6832,1661 6859.91,1688.91 6859.91,1851.09 6851,1860 6851,1881.25 6846.51,1885.74 6846.51,1899.56 6859.55,1912.61 6859.55,1920.55 v1(6860,1921)
  Bottom Layer w4: 6860,1840 6864.04,1844.04 6864.04,1874.85 6873.72,1884.53 6873.72,1900.17 6866.28,1907.61 6866.28,1914.72 v1(6860,1921)
INPUT_55: J3.26 U1.E17 | length 375.3
  Top Layer w4: U1.E17 6919.85,1570 6931,1570 v1(6945,1556)
  Bottom Layer w4: 6835,1795 6835,1764.33 6845.91,1753.43 6845.91,1732.16 6834.09,1720.35 6834.09,1702.91 6889,1648 6889,1612 v1(6945,1556)
INPUT_56: J3.27 U1.F16 | length 560.2
  Top Layer w4: v1(6792,1574) 6829.14,1574.02 6840.8,1585.69 U1.F16
  Third Layer w4: v1(6792,1574) 6776,1574 6760.09,1589.91 6760.09,1617.35 6767.65,1624.91 6773.18,1624.91 6800.92,1652.64 6800.92,1676.92 6818.48,1694.48 6818.48,1743.74 6828.65,1753.91 6828.65,1816.33 6822.09,1822.89 6822.09,1885.32 6834,1897.22 6834,1910.59 v1(6833.25,1911.34)
  Bottom Layer w4: v1(6833.25,1911.34) 6833.66,1911.34 6847.91,1897.09 6847.91,1867.98 6838.58,1858.66 6838.58,1843.58 6835,1840
INPUT_57: J3.29 U1.F17 | length 345.4
  Top Layer w4: U1.F17 6915.17,1555 v1(6924,1555)
  Bottom Layer w4: 6810,1795 6810,1771.75 6802.84,1764.6 6802.84,1753.91 6820,1736.75 6820,1691.5 6852.47,1659.03 6873,1638.5 6873,1606 v1(6924,1555)
INPUT_58: J3.30 U1.G16 | length 600.9
  Top Layer w4: v1(6821,1560) 6823.11,1560 6828.14,1565.02 6863.82,1565.02 U1.G16
  Fourth Layer w4: v1(6810,1921) 6811.49,1919.51 6811.49,1913.51 6823,1902 6823,1890 6822.09,1889.09 6822.09,1820.16 6845.91,1796.35 6845.91,1732.16 6834.09,1720.35 6834.09,1697.09 6792,1655 6792,1643.73 6780.27,1632 6774.75,1632 6760.09,1617.35 6760.09,1582.91 6783,1560 v1(6821,1560)
  Bottom Layer w4: 6810,1840 6810,1872.25 6823,1885.25 6823,1902.5 6810,1915.5 v1(6810,1921)
INPUT_59: J3.31 U1.G17 | length 431.4
  Top Layer w4: U1.G17 6910.48,1540 6934.14,1540 6944.14,1530 v1(6945,1530)
  Bottom Layer w4: 6785,1795 6785,1764.25 6792.04,1757.21 6792.04,1734.38 6779.93,1722.27 6779.93,1695.07 6860,1615 6860,1590 6910,1540 6933.81,1540 6943.81,1530 v1(6945,1530)
INPUT_60: J3.32 U1.H16 | length 598.1
  Top Layer w4: v1(6840,1546) 6840.15,1546.15 6864.65,1546.15 U1.H16
  Fourth Layer w4: v1(6786,1911) 6797.09,1899.91 6797.09,1873.09 6785,1861 6785,1819 6724.1,1758.1 6722.1,1756.1 6722.1,1662.9 6740.28,1644.72 6740.28,1632.03 6734.22,1625.97 6734.22,1586.78 6775,1546 v1(6840,1546)
  Bottom Layer w4: 6785,1840 6785,1861 6797.09,1873.09 6797.09,1899.91 v1(6786,1911)
INPUT_61: J3.33 U1.H17 | length 469.2
  Top Layer w4: U1.H17 6905.79,1525 6927,1525 v1(6945,1507)
  Bottom Layer w4: 6760,1795 6760,1763 6766.23,1756.77 6766.23,1736.98 6758.35,1729.09 6758.09,1729.09 6752.67,1723.67 6752.67,1697.33 6812,1638 6812,1625.75 6829,1608.75 6829,1595 6897.13,1526.88 6923.13,1526.88 6943,1507 v1(6945,1507)
INPUT_62: J3.34 U1.J16 | length 644.3
  Top Layer w4: v1(6823,1526) 6823.31,1526.32 6864.48,1526.32 U1.J16
  Fourth Layer w4: v1(6760,1922) 6772.91,1909.09 6772.91,1886.97 6764,1878.06 6764,1819 6703,1758 6703,1641.75 6723,1621.75 6723,1575.73 6772.73,1526 v1(6823,1526)
  Bottom Layer w4: 6760,1840 6762,1842 6762,1876.06 6773,1887.06 6773,1909 v1(6760,1922)
INPUT_63: J3.35 U1.J17 | length 475
  Top Layer w4: U1.J17 6904.11,1507 v1(6923,1507)
  Bottom Layer w4: 6735,1795 6733.88,1793.88 6733.88,1771.34 6726,1763.46 6726,1658.75 6740.37,1644.37 6740.37,1631.96 6734.22,1625.81 6734.22,1610.53 6798.75,1546 6821.75,1546 6860.75,1507 v1(6923,1507)
INPUT_64: J3.36 U1.K16 | length 656
  Top Layer w4: v1(6840,1506) 6840.47,1506.47 6864.33,1506.47 U1.K16
  Fourth Layer w4: v1(6736,1911) 6736.91,1910.09 6736.91,1899.09 6747.91,1888.09 6747.91,1859.91 6724,1836 6724,1801 6686,1763 6686,1658.75 6677.91,1650.65 6677.91,1616.09 6705.43,1588.57 6705.43,1566.3 6765.73,1506 v1(6840,1506)
  Bottom Layer w4: 6735,1840 6735,1847.5 6747.91,1860.41 6747.91,1888.09 6736.91,1899.09 6736.91,1910.09 v1(6736,1911)
NetC?_1: C?.1 U1.N17 | length 91.3
  Top Layer w10: U1.N17 6921.37,1411 6958.68,1411 C?.1
REF: J2.9 J2.28 J3.9 J3.28 R0.2 REF.1 U1.M1 | length 1538.8
  Top Layer w5: v1(6490,1870) 6475,1855 6475,1794.93 6477.93,1792 6507,1792 6510,1795 ; 6935,1840 6960,1840 6984,1816 6984,1723.43 6971,1710.43 REF.1
  Top Layer w6: v1(6477,1460) 6477,1433.31 R0.2 ; v1@6478.31,1458.69 6479.63,1460 6528.57,1460 6536.14,1467.57 U1.M1
  Fifth Layer w5: v1(6477,1460) 6545.93,1460 6572,1486.07 6572,1665.94 6633.03,1726.97 ; v1(6490,1870) 6633.03,1726.97 ; REF.1 6966.42,1703 6946.42,1683 6677,1683 6633.03,1726.97
  Bottom Layer w5: v1(6490,1870) 6491.3,1868.7 6491.3,1866.2 6510,1847.5 6510,1840 ; 6935,1795 6936,1794 6978,1794 6984,1788 6984,1723.43 6971,1710.43 REF.1
RHD2216_CSN_+: J1.A11 J1.B11 R1.2 U1.N8 | length 721.6
  Top Layer w6: v2(6701,1298) 6701,1300.11 6707.31,1306.42 U1.N8
  Third Layer w6: v2(6645,1298) 6644,1297 6644,1273 6695,1222 6760,1222 6828.65,1153.35 6828.65,1116.37 J1.B11
  Fourth Layer w6: v2(6645,1298) v2(6701,1298)
  Bottom Layer w6: J1.A11 6643.81,1205.56 6643.81,1296.82 v2(6645,1298) ; v2@6644,1299 6644,1384 6657.5,1397.5 R1.2
RHD2216_CSN_-: J1.A10 J1.B10 R1.1 U1.N7 | length 677.8
  Top Layer w6: v2(6687,1318) 6687.31,1318.32 6687.31,1447.58 U1.N7
  Third Layer w6: v2(6687,1318) 6637,1318 6624,1305 6624,1271.44 6688.92,1206.52 6752.96,1206.52 6810,1149.49 6810,1129.22 J1.B10
  Bottom Layer w6: J1.A10 6663.31,1294.32 v2(6687,1318) 6673.95,1331.05 R1.1
RHD2216_MISO_+: J1.A3 J1.B3 U1.N14 | length 584.8
  Top Layer w6: U1.N14 6825.72,1447.61 6825.72,1305.29 v2(6826,1305)
  Fifth Layer w6: J1.B3 6669.22,1116.56 6658.04,1127.74 6658.04,1163.04 6705,1210 6801,1210 6839,1248 6839,1292 v2(6826,1305)
  Bottom Layer w6: J1.A3 6801.11,1280.11 v2(6826,1305)
RHD2216_MISO_-: J1.A2 J1.B2 U1.N13 | length 535.7
  Top Layer w6: U1.N13 6805.74,1283.26 v2(6820,1269)
  Fifth Layer w6: J1.B2 6637.72,1167.72 6694.8,1224.8 6791.8,1224.8 6820,1253 v2(6820,1269)
  Bottom Layer w6: v2(6820,1269) 6820.4,1268.6 6820.4,1205.77 J1.A2
RHD2216_MOSI_+: J1.A7 J1.B7 R3.2 U1.N12 | length 491.8
  Top Layer w6: v2(6721,1255) 6722,1254 6757,1254 v2(6786,1283) U1.N12@6786.03,1447.86
  Fourth Layer w6: v2(6721,1255) 6747.96,1228.04 J1.B7
  Bottom Layer w6: v2(6721,1255) 6721.69,1254.31 6721.69,1206.06 J1.A7 ; v2(6786,1283) R3.2
RHD2216_MOSI_-: J1.A8 J1.B8 R3.1 U1.N11 | length 964.9
  Top Layer w6: v2(6704.21,1274.44) 6738.44,1274.44 v2(6766,1302) ; v2@6766.19,1302.18 6766.19,1447.7 U1.N11
  Third Layer w6: J1.B8 6763.71,1089.29 6776,1077 6901,1077 6963,1139 6963,1197 6925,1235 6812.94,1235 6766,1281.94 v2(6766,1302)
  Bottom Layer w6: J1.A8 6703.45,1206.13 6703.45,1273.67 v2(6704.21,1274.44) ; v2(6766,1302) 6766,1389.49 6769.51,1393 6781.5,1393 R3.1
RHD2216_SCLK_+: J1.A5 J1.B5 R2.2 U1.N10 | length 1025.6
  Top Layer w6: U1.N10 6746.85,1447.73 v2(6746.85,1319)
  Second Layer w6: J1.B5 6734.14,1081 6928,1081 6977,1130 6977,1208 6940.24,1244.76 6785.24,1244.76 6747,1283 6747,1318.85 v2(6746.85,1319)
  Bottom Layer w6: R2.2@6729.63,1397 6729.63,1395.7 6732.84,1392.49 6742.51,1392.49 6747.47,1387.53 6747.47,1319.62 v2(6746.85,1319) 6746.85,1283.15 6761.74,1268.26 J1.A5
RHD2216_SCLK_-: J1.A6 J1.B6 R2.1 U1.N9 | length 479.3
  Top Layer w6: v2@6727.03,1300.01 U1.N9
  Second Layer w6: J1.B6 6716.46,1210.46 6738.46,1232.46 6738.46,1265.44 6727.06,1276.83 v2(6727.06,1299.98)
  Bottom Layer w6: R2.1@6729.63,1357.63 6727.06,1355.07 v2(6727.06,1299.98) 6727,1299.91 6727,1270.94 6742.06,1255.88 J1.A6
VCC: C1.1 J1.A4 J1.A9 J1.B4 J1.B9 U1.M15 U1.M16 U1.N2 U1.N3 U1.N4 U1.N5 U1.N15 | length 1170
  Top Layer w6: U1.N2 U1.N3 ; v2(6609,1414) 6608.89,1414.11 U1.N3 ; C1.1@6641.35,1261 6658.32,1261 6669.83,1272.51 6679.51,1272.51 v2@6681,1274 ; C1.1@6646,1261.68 6646,1263.65 C1.1@6646.35,1264 ; U1.N5 U1.N4 ; J1.B4 6684.97,1188 ; J1.B9 6782,1144.53 6782,1184.49 6778.49,1188 6684.97,1188 ; U1.M15@6844.96,1467.72 U1.M15 ; v1(6858,1407) 6845.11,1419.89 U1.N15 U1.M15 ; U1.M16 U1.M15 ; U1.N3 U1.N4 ; U1.N4 6628.78,1447.67 6628.78,1378.21 6661,1346 6661,1311 6681,1291 v2@6681,1274 ; v2@6681,1274 6681,1204.33 6684.97,1200.36 6684.97,1188
  Third Layer w6: v2(6609,1414) 6608.89,1414.11 6608.89,1459.86 6612.4,1463.38 6839.24,1463.38 6858,1444.62 v1(6858,1407)
  Bottom Layer w6: v2(6680.37,1273.37) 6680.37,1257.11 6683,1254.48 J1.A9 ; J1.B9@6781.86,1140.16 J1.A4@6781.86,1201.58
pads on no net: J1.MH3 J1.MH4 J2.M1 J2.M2 J3.M1 J3.M2 U1.L17 U1.N16

## Polygon pours and split planes (outlines as drawn)
GND on Fourth Layer "NONET_L-01_P-001" (solid, remove dead copper, pour order 4): 6990,5179 7540,5179 7540,4174 6990,4174
GND on Third Layer "NONET_L-01_P-001" (solid, remove dead copper, pour order 6): 6275,5150 6825,5150 6825,4145 6275,4145
GND on Second Layer "NONET_L-01_P-001" (solid, remove dead copper, pour order 7): 5536,5052.5 6086,5052.5 6086,4047.5 5536,4047.5
GND on Fifth Layer "NONET_L-01_P-001" (solid, remove dead copper, pour order 9): 7718,5060.34 8268,5060.34 8268,4055.67 7718,4055.67
GND on Top Layer "NONET_L-01_P-001" (solid, remove dead copper, pour order 8): 4804,4841.5 5354,4841.5 5354,3836.5 4804,3836.5
GND on Bottom Layer "NONET_L-01_P-001" (solid, remove dead copper, pour order 5): 8389,5102 8939,5102 8939,4097 8389,4097

## Keep-outs
Keep-Out Layer:
  lines w6: 6980,955 6470,955 cw(c6470,975) 6450,975 6450,1940 ; 6980.1,955.19 ccw(c6980.1,975.19) 7000.1,975.19 ; 7000,975 7000,1940 ccw(c6980,1940) 6980,1960 6470,1960 ccw(c6470,1940) 6450,1940 ; 6450,1940 6450,1940

## Silkscreen, mask and mechanical layers (free items; w line width, h text height)
Top Overlay:
  text "RHD2164 USBC" at 6959.31,1075.13 h39.37 r180
  text "SBioM" at 6827.55,1013.13 h39.37 r180